# Altium PCB Sample_1.PcbDoc
Units mm, origin at the board's own origin, x right, y up, seen from the top; angles counter-clockwise.
Board outline 43 x 19 mm, 4 copper layers (Top Layer, Layer 1, Layer 2, Bottom Layer), stack 0.871 mm thick; 77 components, 60 nets, 325 pads, 188 vias.
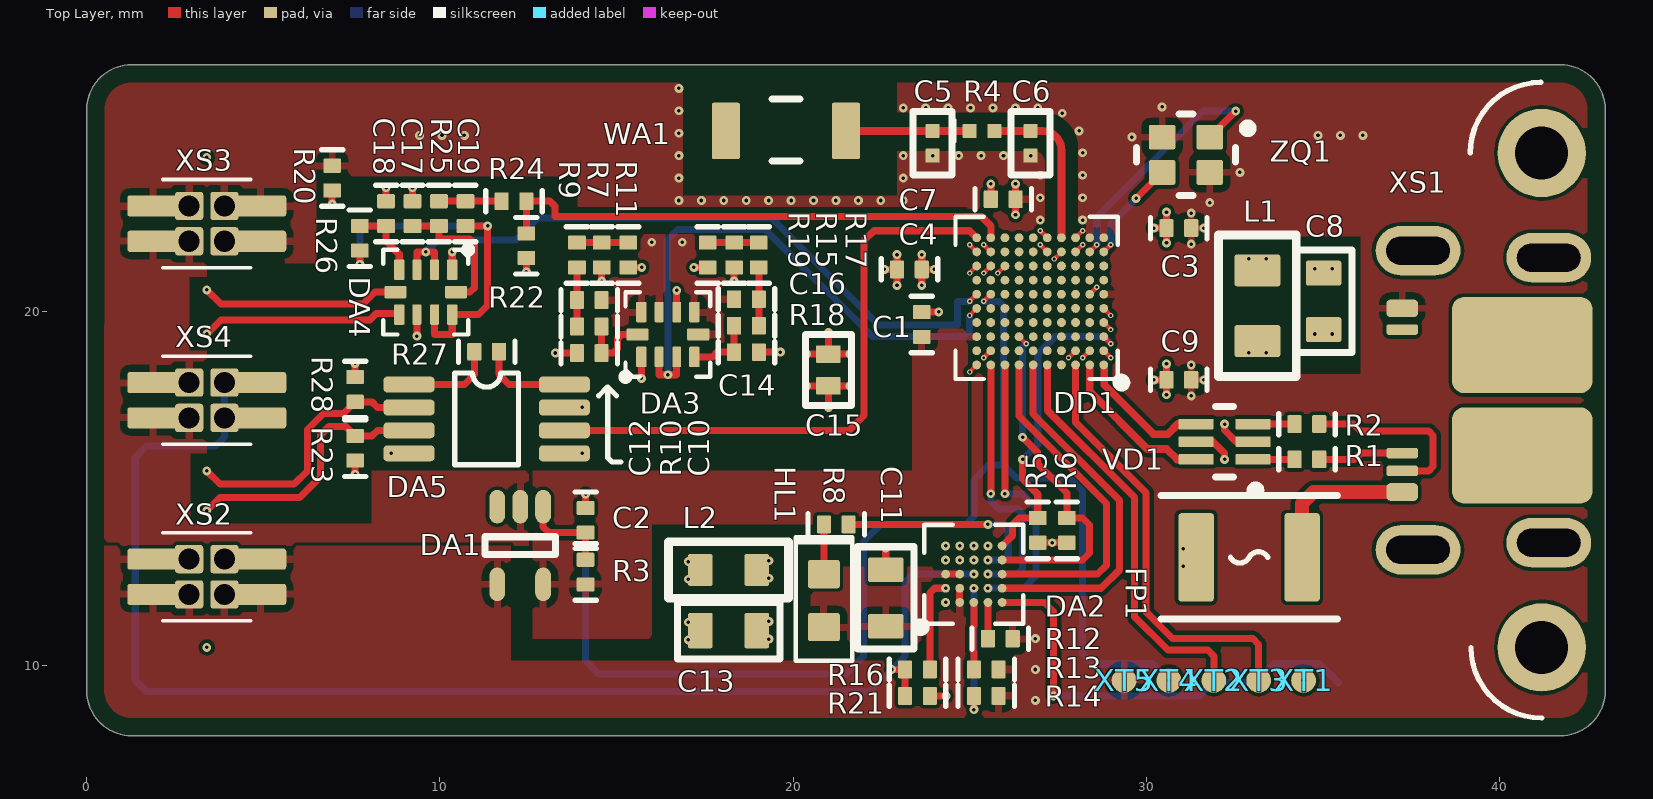
[diagram p0: Top Layer view]
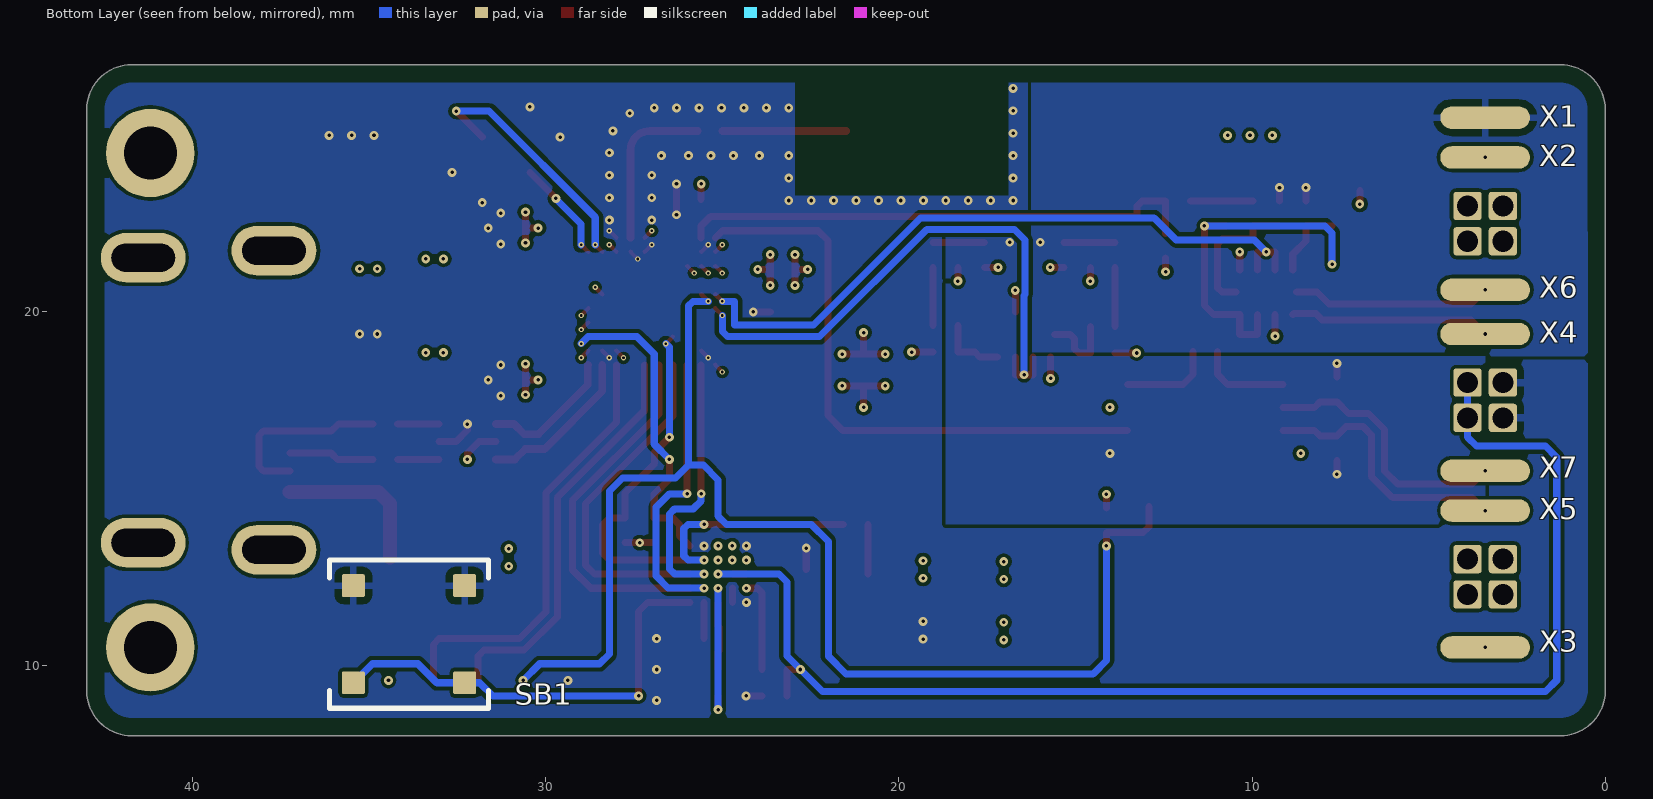
[diagram p1: Bottom Layer view, seen from below]
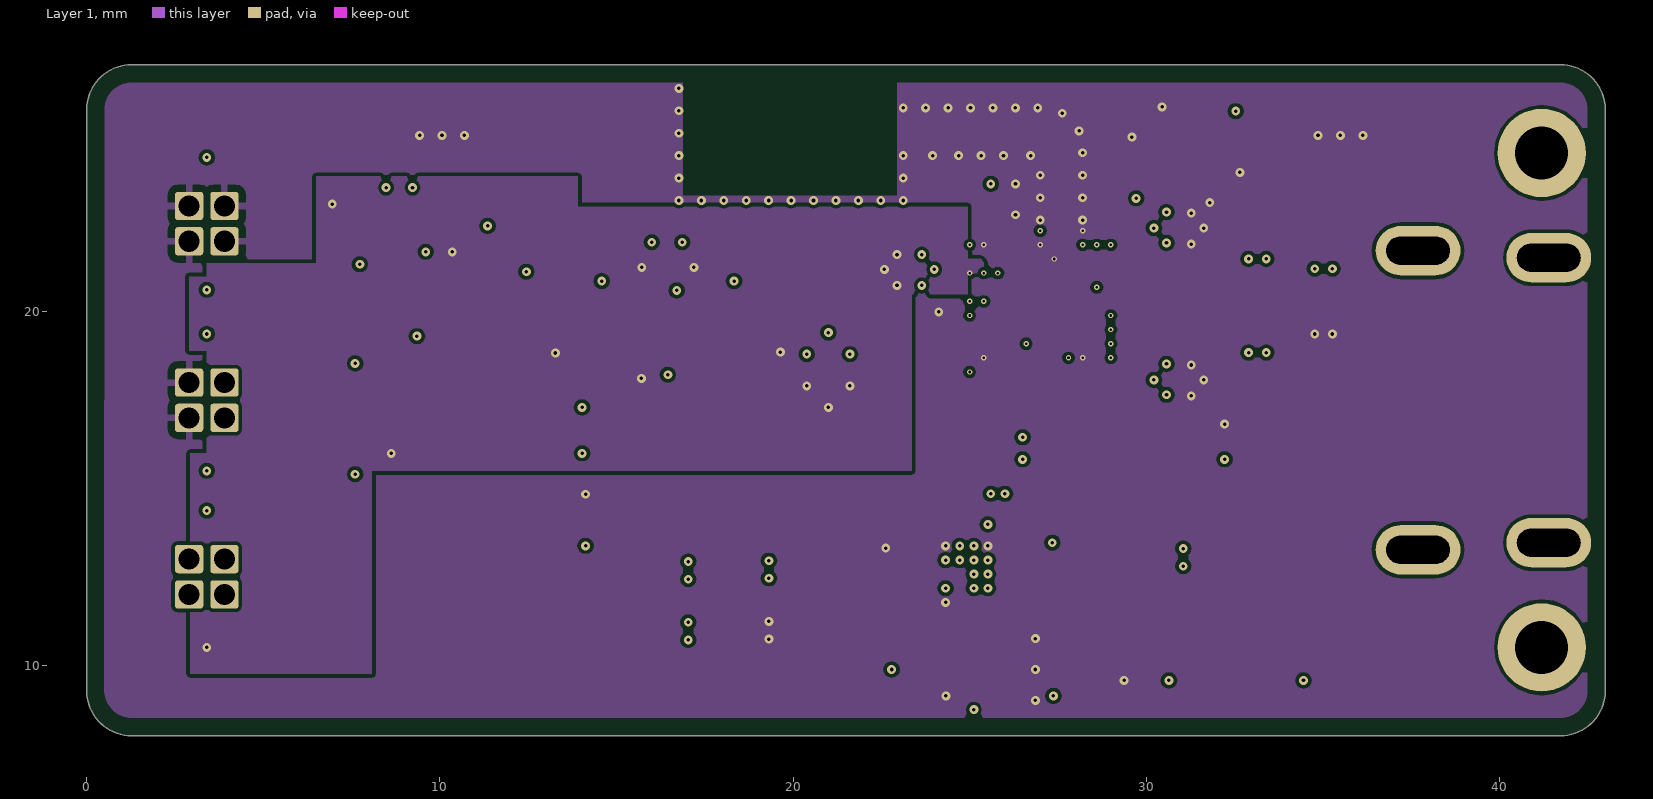
[diagram p2: Layer 1]
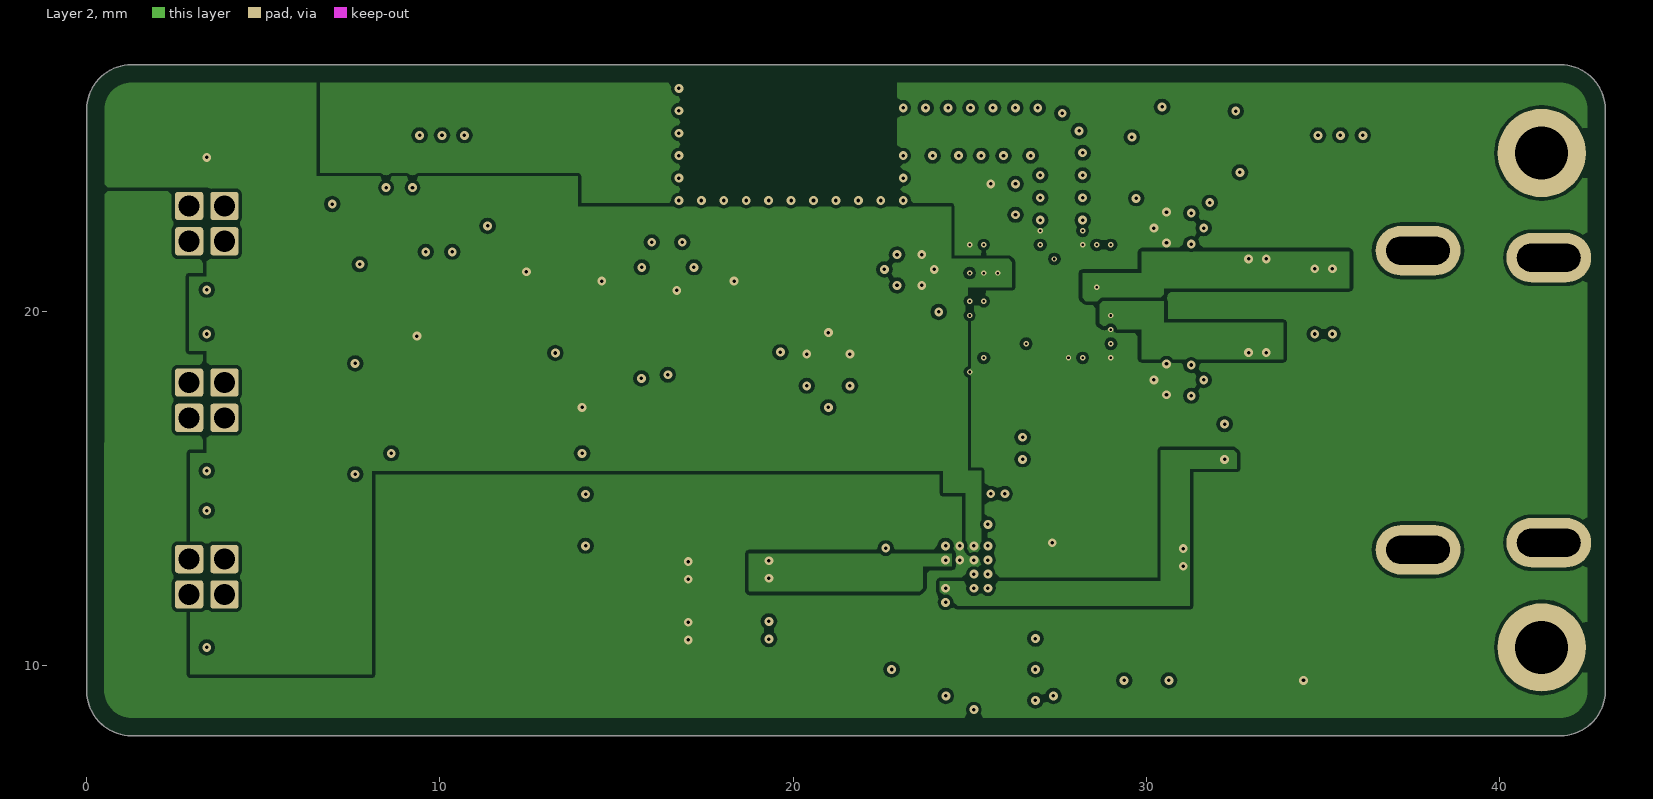
[diagram p3: Layer 2]
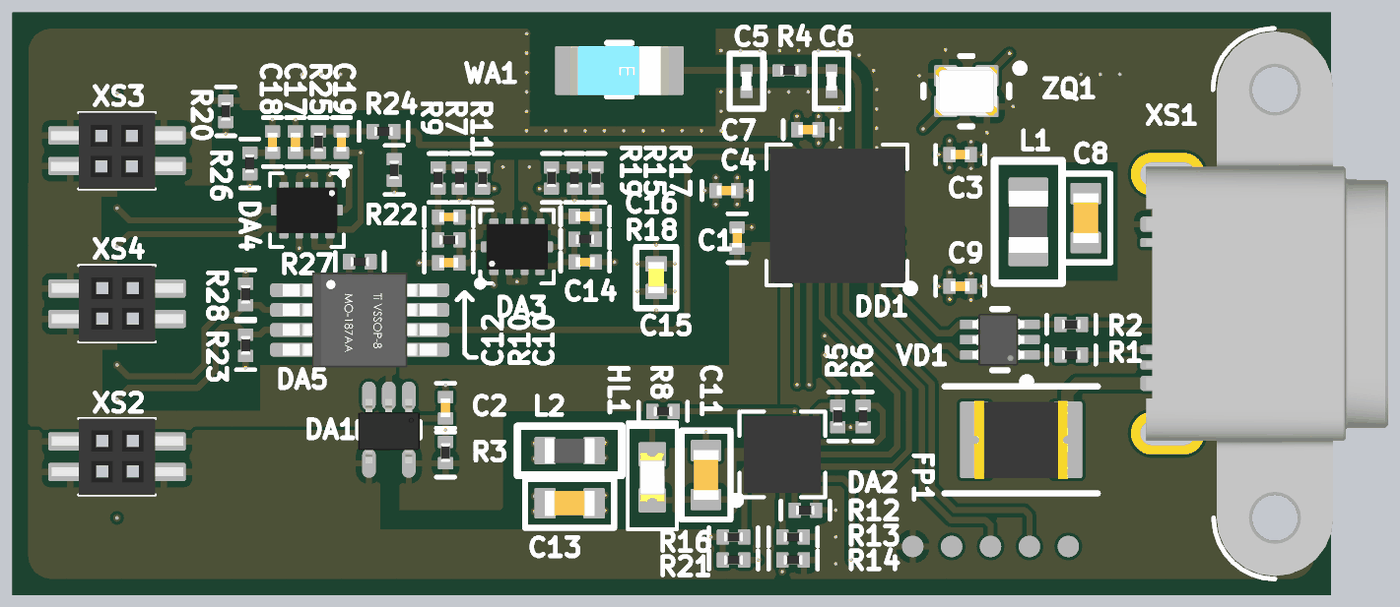
[diagram p4: 3D render of the assembled board from above, using the file's embedded part models]

## Layer stack, top to bottom
Top Solder: solder mask 0.0102, Solder Resist, Dk 3.5
Top Layer: signal copper 0.0356
Dielectric 2: prepreg 0.127, PP-006, Dk 4.1
Layer 1: signal copper 0.018
Dielectric 1: dielectric 0.51, FR-4, Dk 4.8
Layer 2: signal copper 0.018
Dielectric 3: prepreg 0.127, PP-006, Dk 4.1
Bottom Layer: signal copper 0.0356
Bottom Solder: solder mask 0.0102, Solder Resist, Dk 3.5

## Board outline
0,9.25 0,25.73 cw(c1.27,25.73) 1.27,27 41.73,27 cw(c41.73,25.73) 43,25.73 43,9.27 cw(c41.73,9.27) 41.73,8 1.27,8 cw(c1.27,9.27)

## Design rules (kind name [scope] priority, off if disabled: settings)
BoardOutlineClearance [All] p1: gap=0.5 ignorepadtopadclearanceinfootprint=FALSE except(0: Arc-SplitContinuation Track-SplitContinuation SMDPad-SplitContinuation THPad-SplitContinuation Via-SplitContinuation Fill-SplitContinuation Poly-SplitContinuation Region-SplitContinuation Text-SplitContinuation)
Clearance [All] p1: gap=0.1 ignorepadtopadclearanceinfootprint=FALSE except(0: Arc-Hole Track-Hole SMDPad-Hole THPad-Hole Via-Hole Fill-Hole Poly-Hole Region-Hole Text-Hole; 0.05: Arc-Arc Arc-Track Arc-SMDPad Arc-THPad Arc-Via Arc-Text Track-Track Track-SMDPad Track-THPad Track-Via Track-Text SMDPad-Via Via-Via Via-Text; 0.125: Arc-Fill Arc-Poly Arc-Region Track-Fill Track-Poly Track-Region)
ComponentClearance [All] p1: gap=0 collisioncheckmode=3 verticalgap=0 showdistances=FALSE
DiffPairsRouting [All] p1: maxlimit=0.2 minlimit=0.127 mostfreqgap=0.127 toplayer_prefgap=0.2 toplayer_minwidth=0.21 toplayer_maxwidth=0.22 toplayer_prefwidth=0.22 midlayer1_minwidth=0.11 midlayer1_maxwidth=0.11 midlayer1_prefwidth=0.11 midlayer2_minwidth=0.11 midlayer2_maxwidth=0.11 midlayer2_prefwidth=0.11 bottomlayer_minwidth=0.175 bottomlayer_maxwidth=0.175 bottomlayer_prefwidth=0.175 impedanceprofiledriven=TRUE impedanceprofileid={9DE28464-9D2F-4E01-B45C-CA07C9307487} maxuncoupledlength=12.7
HoleToHoleClearance [All] p1: gap=0.2 allowstackedmicrovias=TRUE
MinimumSolderMaskSliver [All] p1: minsoldermaskwidth=0.2
PolygonConnect [HasFootprint('C0201_C0G') vs InNet('GND_Digital')] p1: thpad.connectstyle=Relief thpad.reliefconductorwidth=0.2 thpad.reliefentries=4 thpad.polygonreliefangle="90 Angle" thpad.airgapwidth=0.2 smdpad.connectstyle=Direct smdpad.reliefconductorwidth=0.2 smdpad.reliefentries=4 smdpad.polygonreliefangle="90 Angle" smdpad.airgapwidth=0.2 via.connectstyle=Direct via.reliefconductorwidth=0.254 via.reliefentries=4 via.polygonreliefangle="90 Angle" via.airgapwidth=0.254
PolygonConnect PolygonConnect_1 [HasFootprint('1001312') vs InNet('GND_Digital')] p2: thpad.connectstyle=Relief thpad.reliefconductorwidth=0.2 thpad.reliefentries=4 thpad.polygonreliefangle="90 Angle" thpad.airgapwidth=0.2 smdpad.connectstyle=Direct smdpad.reliefconductorwidth=0.2 smdpad.reliefentries=4 smdpad.polygonreliefangle="90 Angle" smdpad.airgapwidth=0.2 via.connectstyle=Direct via.reliefconductorwidth=0.254 via.reliefentries=4 via.polygonreliefangle="90 Angle" via.airgapwidth=0.254
PolygonConnect PolygonConnect_2 [All] p3: thpad.connectstyle=Relief thpad.reliefconductorwidth=0.2 thpad.reliefentries=4 thpad.polygonreliefangle="90 Angle" thpad.airgapwidth=0.2 smdpad.connectstyle=Relief smdpad.reliefconductorwidth=0.2 smdpad.reliefentries=4 smdpad.polygonreliefangle="90 Angle" smdpad.airgapwidth=0.2 via.connectstyle=Direct via.reliefconductorwidth=0.254 via.reliefentries=4 via.polygonreliefangle="90 Angle" via.airgapwidth=0.254
RoomDefinition Sheet_1 [InComponentClass('Sheet_1')] p1: confinementstyle=ConfineIn formatcopy=TRUE lockcomponents=FALSE outline 0,8 48,8 48,27 0,27
RoomDefinition Sheet_2 [InComponentClass('Sheet_2')] p2: confinementstyle=ConfineIn formatcopy=TRUE lockcomponents=FALSE outline 0,8 43,8 43,27 0,27
RoutingCorners [All] p1: cornerstyle=Round minsetback=2.54 maxsetback=2.54
RoutingTopology [All] p1: topology=Starburst
RoutingVias [All] p1: holewidth=0.3 width=0.6 viastyle="Through Hole" minholewidth=0.05 minwidth=0.1 maxholewidth=5 maxwidth=7
SilkToSilkClearance [All] p1: silktosilkclearance=0
SilkToSolderMaskClearance [IsPad] p1: minsilkscreentomaskgap=0.15 clearancetoexposedcopper=TRUE
SolderMaskExpansion [All] p1: expansion=0
Width Width_1 [InNet('RF_line_50_Ohm')] p1: maxlimit=0.22 minlimit=0.149 preferedwidth=0.22 toplayer_minwidth=0.22 midlayer1_maxwidth=0.149 midlayer1_prefwidth=0.149 midlayer2_maxwidth=0.149 midlayer2_prefwidth=0.149 bottomlayer_minwidth=0.22 impedanceprofiledriven=TRUE impedanceprofileid={D6AA9B95-A936-4709-BEFC-77D6C615F3A8} minimp=50.000000 maximp=50.000000 favimp=50.000000
Width [All] p2: maxlimit=6 minlimit=0.125 preferedwidth=0.254 toplayer_prefwidth=0.2 midlayer1_minwidth=0.254 midlayer1_maxwidth=0.254 midlayer2_minwidth=0.254 midlayer2_maxwidth=0.254 bottomlayer_prefwidth=0.2 minimp=50.000000 maximp=50.000000 favimp=50.000000
22 further rules are at their usual default settings.

## Classes and differential pairs
component class Sheet_2: C10 C11 C12 C13 C14 C15 C16 C17 C18 C19 DA2 DA3 DA4 DA5 HL1 L2 R5 R6 R7 R8 R9 R10 R11 R12 R13 R14 R15 R16 R17 R18 R19 R20 R21 R22 R23 R24 R25 R26 R27 R28 SB1 X1 X2 X3 X4 X5 X6 X7 XS2 XS3 XS4
component class Sheet_1: C1 C2 C3 C4 C5 C6 C7 C8 C9 DA1 DD1 FP1 L1 R1 R2 R3 R4 VD1 WA1 XS1 XT1 XT2 XT3 XT4 XT5 ZQ1
differential pair USB_D: +USB_D_P -USB_D_N

## Components (designator, comment, footprint, x,y, rotation, side; value= is the part's Value field where it differs from the comment)
C1 "X7R" C0201_2 23.645,19.643 r90 top value=0.1u
C2 "X7R" C0201_2 14.125,14.1 r90 top value=0.1u
C3 "X7R" C0201_2 30.925,22.375 r0 top value=0.1u
C4 "X7R" C0201_2 23.295,21.202 r180 top value=0.1u
C5 "C0G" C0201_C0G 23.95,24.775 r270 top value=NC
C6 "C0G" C0201_C0G 26.725,24.775 r270 top value=NC
C7 "X7R" C0201_2 25.95,23.19 r0 top value=0.1u
C8 "X7R" C0603 35.025,20.3 r270 top value=4u7
C9 "X7R" C0201_2 30.925,18.075 r0 top value=0.1u
C10 "X7R" C0201_2 14.231,18.837 r0 top value=0.1u
C11 "X7R" C0603 22.625,11.901 r90 top value=4u7
C12 "X7R" C0201_2 14.231,20.337 r0 top value=0.1u
C13 "X7R" C0603 18.175,10.975 r0 top value=4u7
C14 "X7R" C0201_2 18.681,18.862 r180 top value=0.1u
C15 "X5R" C0402 21,18.355 r270 top value=1u
C16 "X7R" C0201_2 18.681,20.362 r180 top value=0.1u
C17 "X7R" C0201_2 9.225,22.785 r270 top value=0.01u
C18 "X7R" C0201_2 8.475,22.785 r270 top value=0.01u
C19 "X7R" C0201_2 10.725,22.785 r270 top value=0.01u
DA1 "TPS79730QDCKRQ1" SC70-5 12.275,13.384 r180 top value=3.0V
DA2 "BQ25121A" dsbga-25 25.12,12.575 r90 top
DA3 "TLV9042SIRUGR" X2QFN 16.456,19.362 r90 top value=TLV9042S
DA4 "TLV9042SIRUGR" X2QFN 9.6,20.56 r270 top value=TLV9042S
DA5 "INA317IDGKT" VSSOP-8 11.325,16.97 r0 top
DD1 "STM32WB55VC" WLCSP-100 27,20.3 r180 top
FP1 "MF-USM005" F1210 32.915,13.05 r180 top value=MF-USMF010
HL1 "FYLS-0603UGC" LD0603 20.875,11.825 r90 top
L1 "LQM21FN100M70L" L0805 33.15,20.175 r90 top value=10u
L2 "GLFR1608T2R2M-LR" L0603 18.175,12.694 r180 top value=2u2
R1 "ERJ1GN" R0201_2#1 34.55,16.825 r180 top value=22
R2 "ERJ1GN" R0201_2#1 34.55,15.825 r180 top value=22
R3 "ERJ1GN" R0201_2#1 14.125,12.634 r270 top value=51k
R4 "ERJ1GN" R0201_2#2 25.35,25.125 r0 top value=0
R5 "ERJ1GN" R0201_2#1 26.93,13.815 r270 top value=4k7
R6 "ERJ1GN" R0201_2#1 27.755,13.815 r270 top value=4k7
R7 "ERJ1GN" R0201_2#1 14.581,21.611 r270 top value=510k
R8 "ERJ1GN" R0201_2#1 21.225,13.983 r180 top value=510
R9 "ERJ1GN" R0201_2#1 13.881,21.611 r270 top value=510k
R10 "ERJ1GN" R0201_2#1 14.231,19.587 r0 top value=510k
R11 "ERJ1GN" R0201_2#1 15.331,21.611 r90 top value=510k
R12 "ERJ1GN" R0201_2#1 25.87,10.75 r180 top value=15k
R13 "ERJ1GN" R0201_2#1 25.47,9.875 r180 top value=3k9
R14 "ERJ1GN" R0201_2#1 25.47,9.125 r180 top value=2k2
R15 "ERJ1GN" R0201_2#1 18.331,21.611 r270 top value=510k
R16 "ERJ1GN" R0201_2#1 23.525,9.875 r0 top value=51k
R17 "ERJ1GN" R0201_2#1 19.031,21.611 r270 top value=510k
R18 "ERJ1GN" R0201_2#1 18.681,19.612 r180 top value=510k
R19 "ERJ1GN" R0201_2#1 17.581,21.611 r90 top value=510k
R20 "ERJ1GN" R0201_2#1 6.95,23.79 r270 top value=0
R21 "ERJ1GN" R0201_2#1 23.525,9.125 r180 top value=42k2
R22 "ERJ1GN" R0201_2#1 12.45,21.875 r270 top value=51k
R23 "ERJ1GN" R0201_2#1 7.6,16.142 r270 top value=51k
R24 "ERJ1GN" R0201_2#1 12.1,23.135 r180 top value=51k
R25 "ERJ1GN" R0201_2#1 9.975,22.785 r270 top value=51k
R26 "ERJ1GN" R0201_2#1 7.735,22.085 r90 top value=51k
R27 "ERJ1GN" R0201_2#1 11.325,18.875 r180 top value=10k
R28 "ERJ1GN" R0201_2#1 7.6,17.805 r270 top value=51k
SB1 "USLPT3737AL5TR" USLPT3737AL5TR 33.875,10.875 r0 bottom
VD1 "USBLC6-2P6" SOT-666 32.22,16.325 r90 top
WA1 "X7R" AMCA31-2R450G-S1F-T3 19.8,25.125 r180 top value="2.45 GHz"
X1 "Contact" TEST_PIN_2#1 3.4,25.5 r180 bottom
X2 "Contact" TEST_PIN_2#1 3.4,24.375 r180 bottom
X3 "Contact" TEST_PIN_2#1 3.4,10.5 r180 bottom
X4 "Contact" TEST_PIN_2#1 3.4,19.375 r180 bottom
X5 "Contact" TEST_PIN_2#1 3.4,14.375 r180 bottom
X6 "Contact" TEST_PIN_2#1 3.4,20.625 r180 bottom
X7 "Contact" TEST_PIN_2#1 3.4,15.5 r180 bottom
XS1 "2108877-1 TE Connectivity" 2108877-1 43,17.5 r180 top value=2108877-1
XS2 "C5812-04BDGHNTR" C5812-04 3.4,12.5 r180 top
XS3 "C5812-04BDGHNTR" C5812-04 3.4,22.5 r0 top
XS4 "C5812-04BDGHNTR" C5812-04 3.4,17.5 r180 top
XT1 "Test_Pin" TEST_PIN_2#2 34.455,9.565 r90 top
XT2 "Test_Pin" TEST_PIN_2#2 31.915,9.565 r90 top
XT3 "Test_Pin" TEST_PIN_2#2 33.185,9.565 r90 top
XT4 "Test_Pin" TEST_PIN_2#2 30.645,9.565 r90 top
XT5 "Test_Pin" TEST_PIN_2#2 29.375,9.565 r90 top
ZQ1 "XRCGB" XRCGB 31.125,24.45 r180 top value=32MHz

## Footprints (in the part's own frame and the unit in brackets; to place one, negate y for a bottom-side part, rotate by r counter-clockwise, add the part's x,y. Pads: shape width x height; smd on the part's side, far side on the other; paste and mask are expansions set on the pad)
2108877-1 [mm]
  rrect50% 0.9x0.5 smd: 1(5.75,2.6) 5(5.75,-2.6)
  rrect50% 0.9x0.3 smd: 2(5.75,2) 3(5.75,1.5) 4(5.75,-2)
  rrect25% 3.98x2.725 smd: 6(2.35,1.562) 7(2.35,-1.562)
  rrect100% 2.4x1.4 hole 0.8 slot 1.8 at 0 deg: NC(1.6,4.035) NC(1.6,-4.035) NC(5.3,4.235) NC(5.3,-4.235)
  round 2.5 hole 1.5: NC(1.8,7) NC(1.8,-7)
  silkscreen extent 1.8,-9 3.83,9, body extent -1.9,-8.9 6,8.9, height 3.41
AMCA31-2R450G-S1F-T3 [mm]
  rrect15% 0.8x1.6 smd: 1(-1.7,0) 2(1.7,0)
  silkscreen extent -0.4,-0.9 0.4,0.85, body extent -1.6,-0.8 1.6,0.8, height 1.2
C0201_2 [mm] "0603M"
  rrect15% 0.4x0.5 smd: 1(-0.35,0) 2(0.35,0)
  silkscreen extent -0.8,-0.3 0.8,0.3, body extent -0.31,-0.16 0.31,0.16, height 0.34
C0201_C0G [mm] "0603M"
  rrect15% 0.4x0.4 smd: 1(-0.35,0) 2(0.35,0)
  silkscreen extent -0.9,-0.55 0.9,0.55, body extent -0.31,-0.16 0.31,0.16, height 0.34
C0402 [mm] "1005M"
  rrect15% 0.5x0.7 smd: 1(-0.45,0) 2(0.45,0)
  silkscreen extent -1,-0.65 1,0.65, body extent -0.51,-0.26 0.51,0.26, height 0.51
C0603 [mm] "1608M"
  rrect15% 0.7x1 smd: 1(-0.8,0) 2(0.8,0)
  silkscreen extent -1.45,-0.8 1.45,0.8, body extent -0.81,-0.41 0.81,0.41, height 0.82
C5812-04 [mm]
  rrect25% 1.45x0.6 smd: 1(-1.525,0.5) 2(-1.525,-0.5) 3(1.525,-0.5) 4(1.525,0.5)
  rrect20% 0.8x0.8 hole 0.6: 1(-0.5,0.5) 2(-0.5,-0.5) 3(0.5,-0.5) 4(0.5,0.5)
  silkscreen extent -1.25,-1.25 1.25,1.25, body extent -2.16,-1.25 2.14,1.25, height 2.1
dsbga-25 [mm]
  rrect100% 0.25x0.25 smd: A1(-0.8,0.8) A2(-0.4,0.8) A3(0,0.8) A4(0.4,0.8) A5(0.8,0.8) B1(-0.8,0.4) B2(-0.4,0.4) B3(0,0.4) B4(0.4,0.4) B5(0.8,0.4) C1(-0.8,0) C2(-0.4,0) C3(0,0) C4(0.4,0) C5(0.8,0) D1(-0.8,-0.4) D2(-0.4,-0.4) D3(0,-0.4) D4(0.4,-0.4) D5(0.8,-0.4) E1(-0.8,-0.8) E2(-0.4,-0.8) E3(0,-0.8) E4(0.4,-0.8) E5(0.8,-0.8)
  silkscreen extent -1.62,-1.4 1.4,1.62, body extent -1.25,-1.25 1.25,1.25, height 0.55
F1210 [mm]
  rrect15% 1x2.5 smd: 1(-1.5,0) 2(1.5,0)
  silkscreen extent -2.5,-1.75 2.5,1.75, body extent -1.52,-1.27 1.52,1.27, height 0.83
L0603 [mm] "1608M"
  rrect15% 0.7x0.9 smd: 1(-0.8,0) 2(0.8,0)
  Top Layer pour cut-out: -0.45,0.5 0.45,0.5 0.45,-0.5 -0.45,-0.5
  silkscreen extent -1.7,-0.8 1.7,0.8, body extent -0.81,-0.41 0.81,0.41, height 0.81
L0805 [mm]
  rrect15% 0.9x1.3 smd: 1(-1,0) 2(1,0)
  Top Layer pour cut-out: -0.65,0.8 0.65,0.8 0.65,-0.8 -0.65,-0.8
  silkscreen extent -2,-1.1 2,1.1, body extent -1.01,-0.64 1.01,0.63, height 0.96
LD0603 [mm]
  rrect15% 0.8x0.9 smd: 1(-0.75,0) 2(0.75,0)
  silkscreen extent -1.7,-0.8 1.8,0.8, body extent -0.8,-0.4 0.8,0.4, height 0.7
R0201_2#1 [mm] "1005M"
  rrect15% 0.4x0.5 smd: 1(-0.35,0) 2(0.35,0)
  silkscreen extent -0.8,-0.3 0.8,0.3, body extent -0.3,-0.15 0.3,0.15, height 0.23
R0201_2#2 [mm] "1005M"
  rrect15% 0.4x0.4 smd: 1(-0.35,0) 2(0.35,0)
  silkscreen extent -0.8,-0.3 0.8,0.3, body extent -0.3,-0.15 0.3,0.15, height 0.23
SC70-5 [mm]
  rrect100% 0.45x0.95 smd: 1(-0.65,-1.1) 2(0,-1.1) 3(0.65,-1.1) 4(0.65,1.1) 5(-0.65,1.1)
  silkscreen extent -1,-0.25 1,0.25, body extent -1,-1 1,1.1, height 0.95
SOT-666 [mm]
  rrect15% 0.3x0.99 smd: 1(-0.5,-0.805) 2(0,-0.805) 3(0.5,-0.805) 4(0.5,0.805) 5(0,0.805) 6(-0.5,0.805)
  silkscreen extent -1.5,-1 1,0.25, body extent -0.85,-0.8 0.85,0.9, height 0.6
TEST_PIN_2#1 [mm]
  rrect100% 2.54x0.635 smd: 1(0,0)
TEST_PIN_2#2 [mm]
  rrect100% 0.7x0.7 smd: 1(0,0)
USLPT3737AL5TR [mm]
  rrect15% 0.65x0.65 smd: 1(-1.575,1.375) 2(-1.575,-1.375) 3(1.575,1.375) 4(1.575,-1.375)
  silkscreen extent -2.25,-2.1 2.25,2.1, body extent -1.85,-1.85 1.85,1.85, height 0.35
VSSOP-8 [mm]
  rrect50% 1.45x0.45 smd: 1(-2.2,0.975) 2(-2.2,0.325) 3(-2.2,-0.325) 4(-2.2,-0.975) 5(2.2,-0.975) 6(2.2,-0.325) 7(2.2,0.325) 8(2.2,0.975)
  silkscreen extent -0.9,-1.3 0.9,1.3, body extent -2.52,-1.55 2.52,1.55, height 1.15
WLCSP-100 [mm]
  rrect100% 0.25x0.25 smd: A1(-1.8,1.8) A2(-1.4,1.8) A3(-1,1.8) A4(-0.6,1.8) A5(-0.2,1.8) A6(0.2,1.8) A7(0.6,1.8) A8(1,1.8) A9(1.4,1.8) A10(1.8,1.8) B1(-1.8,1.4) B2(-1.4,1.4) B3(-1,1.4) B4(-0.6,1.4) B5(-0.2,1.4) B6(0.2,1.4) B7(0.6,1.4) B8(1,1.4) B9(1.4,1.4) B10(1.8,1.4) C1(-1.8,1) C2(-1.4,1) C3(-1,1) C4(-0.6,1) C5(-0.2,1) C6(0.2,1) C7(0.6,1) C8(1,1) C9(1.4,1) C10(1.8,1) D1(-1.8,0.6) D2(-1.4,0.6) D3(-1,0.6) D4(-0.6,0.6) D5(-0.2,0.6) D6(0.2,0.6) D7(0.6,0.6) D8(1,0.6) D9(1.4,0.6) D10(1.8,0.6) E1(-1.8,0.2) E2(-1.4,0.2) E3(-1,0.2) E4(-0.6,0.2) E5(-0.2,0.2) E6(0.2,0.2) E7(0.6,0.2) E8(1,0.2) E9(1.4,0.2) E10(1.8,0.2) F1(-1.8,-0.2) F2(-1.4,-0.2) F3(-1,-0.2) F4(-0.6,-0.2) F5(-0.2,-0.2) F6(0.2,-0.2) F7(0.6,-0.2) F8(1,-0.2) F9(1.4,-0.2) F10(1.8,-0.2) G1(-1.8,-0.6) G2(-1.4,-0.6) G3(-1,-0.6) G4(-0.6,-0.6) G5(-0.2,-0.6) G6(0.2,-0.6) G7(0.6,-0.6) G8(1,-0.6) G9(1.4,-0.6) G10(1.8,-0.6) H1(-1.8,-1) H2(-1.4,-1) H3(-1,-1) H4(-0.6,-1) H5(-0.2,-1) H6(0.2,-1) H7(0.6,-1) H8(1,-1) H9(1.4,-1) H10(1.8,-1) J1(-1.8,-1.4) J2(-1.4,-1.4) J3(-1,-1.4) J4(-0.6,-1.4) J5(-0.2,-1.4) J6(0.2,-1.4) J7(0.6,-1.4) J8(1,-1.4) J9(1.4,-1.4) J10(1.8,-1.4) K1(-1.8,-1.8) K2(-1.4,-1.8) K3(-1,-1.8) K4(-0.6,-1.8) K5(-0.2,-1.8) K6(0.2,-1.8) K7(0.6,-1.8) K8(1,-1.8) K9(1.4,-1.8) K10(1.8,-1.8)
  silkscreen extent -2.42,-2.4 2.4,2.42, body extent -2.12,-2.28 2.28,2.12, height 0.63
X2QFN [mm]
  rrect25% 0.58x0.3 smd: 1(-0.635,0.75) 4(-0.635,-0.75) 6(0.635,-0.75) 9(0.635,0.75)
  rrect25% 0.58x0.25 smd: 2(-0.635,0.25) 3(-0.635,-0.25) 7(0.635,-0.25) 8(0.635,0.25)
  rrect25% 0.35x0.63 smd: 5(0,-0.86) 10(0,0.86)
  silkscreen extent -1.27,-1.2 1.2,1.27, body extent -0.75,-1 0.75,1, height 0.35
XRCGB [mm]
  rrect15% 0.75x0.7 smd: 1(-0.675,-0.5) 2(0.675,-0.5) 3(0.675,0.5) 4(-0.675,0.5)
  silkscreen extent -1.85,-1.15 1.4,1.15, body extent -1,-0.8 1,0.8, height 0.65

## Part data
C1 C2 C3 C4 C7 C9 C10 C12 C14 C16 C18: library part "X7R C0201", Voltage=16V, Published=18.05.2010, Publisher="Andrew Danich", Type=Конденсатор
C5 C6: library part "C0G C0201", Published=18.05.2010, Publisher="Andrew Danich", Type=Конденсатор
C8: library part "X7R C0603", Voltage=6.3V, Published=18.05.2010, Publisher="Andrew Danich", Type=Конденсатор
C11 C13: library part "X7R C0603", Voltage=10V, Published=18.05.2010, Publisher="Andrew Danich", Type=Конденсатор
C15: library part "X5R C0402", Voltage=6.3V, Published=18.05.2010, Publisher="Andrew Danich", Type=Конденсатор
C17 C19: library part "X7R C0201", Voltage=50V, Published=18.05.2010, Publisher="Andrew Danich", Type=Конденсатор
R1 R2 R3 R4 R5 R6 R7 R8 R9 R10 R11 R12 R13 R14 R15 R16 R17 R18 R19 R20 R21 R22 R23 R24 R25 R26 R27 R28: library part R0201, Published=19.09.2014, Publisher="Andrew Danich", Type=Резистор
WA1: library part AMCA31-2R450G-S1F-T3, Published=18.05.2010, Publisher="Andrew Danich", Type=Конденсатор, Z="50 Ohm"
XS1: library part 2108877-1, 1_line="V Bus", 2_line=D-, 3_line=D+, 4_line=ID, 5_line=GND, 6_line=CORP, 7_line=CORP, Published=07.03.2013, Publisher="Andrew Danich", Type=Розетка
DA1: Name=TPS79730QDCKRQ1, Published=21.01.2015, Publisher="Andrew Danich", Type=Микросхема
DA2: Published=29.07.2015, Publisher="Andrew Danich", Type=Модуль
DA3 DA4: Published=08.12.2013, Publisher="Andrew Danich", Type=Микросхема
DA5: Published=19.12.2015, Publisher="Andrew Danich", Type=Микросхема
DD1: Published=16.10.2015, Publisher="Andrew Danich", Type=Микросхема
FP1: Published=24.09.2010, Publisher="Andrew Danich", Type="Вставка плавкая"
HL1: Published=03.12.2013, Publisher="Andrew Danich", Type="Индикатор единичный"
L1: Name=LQM21FN100M70L, Published=20.05.2010, Publisher="Andrew Danich", Type=Дроссель
L2: Name=GLFR1608T2R2M-LR, Published=20.05.2010, Publisher="Andrew Danich", Type=Дроссель
SB1: Published=17.04.2014, Publisher="Andrew Danich", Type=Переключатель
VD1: Published=08.07.2014, Publisher="Andrew Danich", Type="Сборка диодная"
X1 X2 X3 X4 X5 X6 X7 XT1 XT2 XT3 XT4 XT5: Published=07.03.2013, Publisher="Andrew Danich", Type=Розетка
XS2: 1_line=V_Battery, 2_line=V_Battery, 3_line=V_Battery, 4_line=V_Battery, Published=07.03.2013, Publisher="Andrew Danich", Type=Розетка
XS3: 1_line=GND_Digital, 2_line=GND_Digital, 3_line=GND_Digital, 4_line=GND_Digital, Published=07.03.2013, Publisher="Andrew Danich", Type=Розетка
XS4: 1_line=TS_Battery, 2_line=TS_Battery, 3_line=GND_Digital, 4_line=GND_Digital, Published=07.03.2013, Publisher="Andrew Danich", Type=Розетка
ZQ1: Model=XRCGB, Published=27.08.2015, Publisher="Andrew Danich", Type=Резонатор

## Via types
v1: diameter 0.25, hole 0.1, Top Layer to Bottom Layer, tented both sides, 163 vias
v2: diameter 0.15, hole 0.075, Top Layer to Bottom Layer, tented both sides, 25 vias

## Nets (pads, with @x,y where several pads share a name; then routed paths per layer and width w, separated by ;. In a path a pad name is that pad's centre, name@x,y a point inside that pad or via, vN(x,y) a via of type N, cw(c..) or ccw(c..) an arc to the next point about the centre after c; other vN are vias at no path point)
ADC_Signal: DA5.6 DD1.K10 | length 17
  Top Layer w0.2: DA5.6 21.594,16.645 22.012,17.064 22.012,22.021 22.29,22.298 25.002,22.298 DD1.K10
Battery_TS: DA2.C3 R16.1 R21.2 XS4.1 XS4.2 | length 38.2
  Top Layer w0.2: v1(22.789,9.875) R16.1 R21.2
  Bottom Layer w0.2: XS4.2@3.9,18 3.9,17 3.9,16.452 3.648,16.2 1.695,16.2 1.375,15.88 1.375,9.57 1.695,9.25 22.164,9.25 v1(22.789,9.875) 23.175,10.261 23.175,12.35 23.4,12.575 v1(25.12,12.575)
DAC_PWM_Signal: DD1.K9 R22.1 R24.1 | length 14.9
  Top Layer w0.2: R22.1 R24.1 13.12,23.135 13.255,23 13.255,22.697 25.342,22.697 25.6,22.439 DD1.K9
GEN_EN: DA4.2 DA4.3 DD1.F10 | length 19.5
  Top Layer w0.125: v2(25,20.3) DD1.F10
  Top Layer w0.2: DA4.3 9.35,21.7 v1(9.6,21.7) 9.85,21.7 DA4.2
  Bottom Layer w0.2: v1(9.6,21.7) 9.938,22.038 12.148,22.038 12.773,22.664 19.385,22.664 22.424,19.625 24.651,19.625 24.651,20.3 v2(25,20.3)
GND_Analog: C4.2 C10.1 C14.1 C15.2 DA3.1 DA4.1 DA5.4 DD1.H10 R11.1 R19.1 R20.2 X3.1 | length 6.8
  Top Layer w0.125: v2(25,21.1) DD1.H10
  Top Layer w0.2: v1(6.95,23.054) R20.2 ; DA4.1 v1(10.35,21.7) ; v1(13.27,18.837) C10.1 ; R11.1 v1(15.718,21.261) ; v1(15.706,18.116) DA3.1 ; v1(17.195,21.261) R19.1 ; C14.1 v1(19.642,18.862) ; v1(20.389,17.905) C15.2 ; v1(21,17.294) C15.2 ; v1(21.611,17.905) C15.2 ; v1(22.589,21.202) C4.2 ; v1(22.945,20.75) C4.2 ; v1(22.945,21.625) C4.2
  other v1: 3.4,10.5 8.625,15.995
GND_Digital: C1.2 C2.2 C3.2 C5.2 C6.2 C7.2 C8.2 C9.2 C11.2 C13.2 DA1.2 DA2.A1 DA2.A5 DA2.D5 DD1.B2 DD1.B9 DD1.F1 DD1.J4 DD1.J5 DD1.J9 DD1.K1 DD1.K2 DD1.K3 R12.1 R13.1 R14.1 R20.1 R21.1 SB1.2 SB1.4 VD1.2 XS1.5 XS3.1 XS3.2 XS3.3 XS3.4 XS4.3 XS4.4 XT5.1 ZQ1.2 ZQ1.4 | length 5.6
  Top Layer w0.125: v2(25.4,18.7) DD1.B9 ; v2(25.4,21.9) DD1.J9 ; v2(27,21.9) DD1.J5 ; v2(27.4,21.5) DD1.J4 ; DD1.K3 v2(28.2,22.3) ; v2(28.2,18.7) DD1.B2
  Top Layer w0.2: C2.2 v1(14.125,14.836) ; C11.2 v1(22.625,13.312) ; C1.2 23.651,20 v1(24.125,20) ; R21.1 v1(24.327,9.125) ; v1(26.3,22.75) C7.2 v1(26.3,23.625) ; v1(32.22,16.825) 32.22,16.652 32.547,16.325 VD1.2
  other v1: 26.865,8.998 29.375,9.565 26.865,9.875 19.317,10.738 26.865,10.752 19.317,11.238 24.32,11.775 24.32,13.375 25.52,13.375 31.275,17.623 31.63,18.075 31.275,18.498 34.775,19.375 35.275,19.375 31.275,21.923 31.63,22.375 27,22.6 28.2,22.6 31.275,22.798 31.8,23.095 16.77,23.155 17.405,23.155 18.04,23.155 18.675,23.155 19.31,23.155 19.945,23.155 20.58,23.155 21.215,23.155 21.85,23.155 22.485,23.155 23.12,23.155 27,23.235 28.2,23.235 16.77,23.79 23.12,23.79 27,23.87 28.2,23.87 32.655,23.95 16.77,24.425 23.12,24.425 23.95,24.425 24.69,24.425 25.325,24.425 25.96,24.425 26.725,24.425 28.2,24.505 29.595,24.95 9.425,25 10.06,25 10.695,25 34.865,25 35.5,25 36.135,25 16.77,25.06 28.1,25.125 27.625,25.625 16.77,25.695 23.12,25.775 23.755,25.775 24.39,25.775 25.025,25.775 25.66,25.775 26.295,25.775 26.93,25.775 30.45,25.805 16.77,26.33
INT_Battery: DA2.D2 DD1.A8 | length 8.1
  Top Layer w0.2: v1(26,14.85) DD1.A8
  Bottom Layer w0.2: v1(25.52,12.175) 25.53,12.185 26.539,12.185 26.875,12.521 26.875,14.473 26.498,14.85 v1(26,14.85)
LSCTRL_Battery: DA2.E3 DD1.A7 | length 9.8
  Top Layer w0.2: DA2.E3 28.625,12.575 28.875,12.825 28.875,14.575 26.4,17.05 DD1.A7
N_CD_Battery: DA2.E2 DD1.A6 | length 10.4
  Top Layer w0.2: DA2.E2 28.725,12.175 29.25,12.7 29.25,14.66 26.8,17.11 DD1.A6
N_RST: C2.1 DA1.1 DD1.F9 R3.1 XT4.1 | length 38.1
  Top Layer w0.125: v2(25.4,20.3) DD1.F9
  Top Layer w0.2: DA1.1 12.925,13.914 13.089,13.75 C2.1 v1(14.125,13.375) R3.1
  Bottom Layer w0.2: v1(14.125,13.375) 14.125,10.125 14.5,9.75 21.5,9.75 22,10.25 22,13.5 22.483,13.983 24.887,13.983 25.12,14.215 25.12,15.245 25.54,15.665 25.96,15.665 ; v2(25.4,20.3) 25.835,20.3 25.96,20.175 25.96,15.665 ; v1(30.645,9.565) 30.173,10.037 28.48,10.037 28.2,10.317 28.2,14.925 27.825,15.3 26.325,15.3 25.96,15.665
N_RST_Battery: DA2.D3 DD1.A9 | length 7.5
  Top Layer w0.2: v1(25.6,14.85) DD1.A9
  Bottom Layer w0.2: v1(25.52,12.575) 26.35,12.575 26.5,12.725 26.5,14.275 26.35,14.425 25.825,14.425 25.6,14.65 v1(25.6,14.85)
NetC5_1: C5.1 R4.1 WA1.1 | length 3.5
  Top Layer w0.22: WA1.1 C5.1 R4.1
NetC8_1: C8.1 DD1.F2 L1.2 | length 0.3
  Top Layer w0.125: DD1.F2 v2(28.6,20.7)
  other v1: 34.775,21.225 35.275,21.225 32.9,21.5 33.4,21.5
NetC10_2: C10.2 DA3.10 R10.2 | length 2.1
  Top Layer w0.2: R10.2 C10.2 14.906,18.837 15.027,18.958 15.027,19.241 15.149,19.362 DA3.10
NetC11_1: C11.1 DA2.A3 DA2.B3 HL1.1 | length 0.4
  Top Layer w0.2: DA2.A3 DA2.B3
NetC12_1: C12.1 R9.2 R10.1 | length 1.7
  Top Layer w0.2: R10.1 C12.1 R9.2
NetC14_2: C14.2 DA3.4 R18.2 | length 1.9
  Top Layer w0.2: DA3.4 17.716,18.727 17.851,18.862 C14.2 R18.2
NetC16_1: C16.1 R17.2 R18.1 | length 1.6
  Top Layer w0.2: R18.1 C16.1 R17.2
NetC17_2: C17.2 DA4.10 R25.2 | length 4
  Top Layer w0.2: C17.2 R25.2 9.975,22.06 10.853,22.06 10.975,21.938 10.975,20.677 10.858,20.56 DA4.10
NetC18_2: C18.2 DA4.4 R26.2 | length 2.1
  Top Layer w0.2: R26.2 C18.2 8.475,22.01 8.85,21.635 DA4.4
NetC19_1: C19.1 R24.2 R25.1 | length 1.8
  Top Layer w0.2: R25.1 C19.1 R24.2
NetC19_2: C19.2 DA4.8 DA4.9 R26.1 | length 10.6
  Top Layer w0.2: v1(7.735,21.349) R26.1 ; DA4.8 9.85,19.362 10.35,19.362 DA4.9 11.09,19.925 11.35,20.185 v1(11.35,22.435) C19.2
  Bottom Layer w0.2: v1(7.735,21.349) 7.735,22.235 7.935,22.435 v1(11.35,22.435)
NetDA2_A4: DA2.A4 L2.1
  other v1: 19.317,12.457 19.317,12.957 24.32,12.975
NetDA2_C1: DA2.C1 R13.2 | length 1.9
  Top Layer w0.2: R13.2 25.125,9.88 25.125,10.375 25.095,10.405 25.095,11.076 25.12,11.101 DA2.C1
NetDA2_C2: DA2.C2 R14.2 | length 3.8
  Top Layer w0.2: v1(25.12,8.739) R14.2
  Bottom Layer w0.2: v1(25.12,8.739) v1(25.12,12.175)
NetDA2_D1: DA2.D1 R12.2 | length 1
  Top Layer w0.2: R12.2 DA2.D1
NetDA2_D4: DA2.D4 R8.1 | length 6
  Top Layer w0.2: R8.1 v1(25.518,13.983)
  Bottom Layer w0.2: v1@25.51,12.985 v1(25.52,12.975) 25.975,12.975 26.095,13.095 26.095,13.863 25.975,13.983 v1(25.518,13.983)
NetDA2_E1: DA2.E1 SB1.1 SB1.3 | length 12.6
  Top Layer w0.2: DA2.E1 27.12,11.775 27.375,11.52 v1(27.375,9.125)
  Bottom Layer w0.2: v1(27.375,9.125) 31.5,9.125 31.875,9.5 SB1.1 33.087,9.5 33.625,10.037 34.913,10.037 SB1.3
NetDA4_5: DA4.5 X6.1 | length 5.6
  Top Layer w0.2: v1(3.4,20.625) 3.8,20.225 7.825,20.225 8.16,20.56 DA4.5
NetDA4_6: DA4.6 X4.1 | length 5.7
  Top Layer w0.2: v1(3.4,19.375) 3.8,19.775 8.015,19.775 8.19,19.949 8.826,19.949 DA4.6
NetDA5_1: DA5.1 R27.2 | length 2.6
  Top Layer w0.2: DA5.1 10.695,17.945 10.975,18.225 R27.2
NetDA5_2: DA5.2 R28.2 X7.1 | length 7.6
  Top Layer w0.2: v1(3.4,15.5) 3.775,15.125 5.875,15.125 6.25,15.5 6.25,16.675 6.7,17.125 7.27,17.125 R28.2 8.072,17.455 8.231,17.295 DA5.2
NetDA5_3: DA5.3 R23.1 X5.1 | length 7.6
  Top Layer w0.2: v1(3.4,14.375) 3.775,14.75 6.03,14.75 6.625,15.345 6.625,16.52 6.855,16.75 7.342,16.75 R23.1 8.078,16.492 8.231,16.645 DA5.3
NetDA5_8: DA5.8 R27.1 | length 2.6
  Top Layer w0.2: R27.1 11.675,18.225 11.955,17.945 DA5.8
NetDD1_E1: DD1.E1 L1.1 | length 0.3
  Top Layer w0.125: DD1.E1 v2(29,19.9)
  other v1: 32.9,18.85 33.4,18.85
NetDD1_J1: DD1.J1 ZQ1.3 | length 2.9
  Top Layer w0.125: DD1.J1 v2(29,21.9)
  Top Layer w0.2: v1(29.715,23.215) ZQ1.3
  Bottom Layer w0.2: v2(29,21.9) 29,22.486 29.715,23.202 v1(29.715,23.215)
NetDD1_J2: DD1.J2 ZQ1.1 | length 7.3
  Top Layer w0.125: DD1.J2 v2(28.6,21.9)
  Top Layer w0.2: ZQ1.1 v1(32.535,25.685)
  Bottom Layer w0.2: v2(28.6,21.9) 28.6,22.679 31.606,25.685 v1(32.535,25.685)
NetFP1_1: FP1.1 XS1.1 | length 4.5
  Top Layer w0.4: FP1.1 34.415,14.575 34.74,14.9 XS1.1
NetHL1_2: HL1.2 R8.2 | length 1.4
  Top Layer w0.2: HL1.2 R8.2
NetR1_1: R1.1 XS1.2 | length 5.2
  Top Layer w0.2: R1.1 35.875,16.825 36.075,16.625 38,16.625 38.125,16.5 38.125,15.625 38,15.5 XS1.2
NetR1_2: R1.2 VD1.3 | length 1.2
  Top Layer w0.2: VD1.3 R1.2
NetR2_1: R2.1 XS1.3 | length 2.4
  Top Layer w0.2: R2.1 35.9,15.825 36.075,16 XS1.3
NetR2_2: R2.2 VD1.1 | length 1.2
  Top Layer w0.2: VD1.1 R2.2
NetR7_1: R7.1 R9.1 R11.2 | length 1.4
  Top Layer w0.2: R9.1 R7.1 R11.2
NetR15_1: R15.1 R17.1 R19.2 | length 1.5
  Top Layer w0.2: R19.2 R15.1 R17.1
REF_1: C12.2 C17.1 C18.1 DA3.8 DA3.9 X1.1 | length 0.8
  Top Layer w0.2: C18.1 v1(8.475,23.521) ; C17.1 v1(9.225,23.521)
  other v1: 16,21.973
REF_2: C16.2 DA3.5 DA3.6 DA5.5 R23.2 R28.1 | length 0.8
  Top Layer w0.2: v1(7.6,15.406) R23.2 ; R28.1 v1(7.6,18.541)
  other v1: 14.025,15.995 16.861,21.973
REF_EN: DA3.2 DA3.3 DD1.E10 | length 16.1
  Top Layer w0.125: v2(25,19.9) DD1.E10
  Top Layer w0.2: DA3.2 16.206,18.222 v1(16.456,18.222) 16.706,18.222 DA3.3
  Bottom Layer w0.2: v1(16.456,18.222) 16.456,20.469 16.431,20.494 16.431,22.038 16.732,22.339 19.212,22.339 22.251,19.3 24.858,19.3 25,19.442 v2(25,19.9)
RF_line_50_Ohm: C6.1 DD1.K4 R4.2 | length 4.7
  Top Layer w0.22: R4.2 C6.1 27.06,25.125 cw(c27.06,24.585) 27.6,24.585 DD1.K4
SCL_Battery: DA2.E5 DD1.C1 R5.1 | length 9.2
  Top Layer w0.125: DD1.C1 v2(29,19.1)
  Top Layer w0.2: DA2.E5 26.22,13.675 26.22,13.985 26.4,14.165 R5.1 26.93,14.837 26.5,15.267 v1(26.5,15.825)
  Bottom Layer w0.2: v1(26.5,15.825) 26.93,16.255 26.93,18.805 27.425,19.3 28.8,19.3 v2(29,19.1)
SDA_Battery: DA2.E4 DD1.C7 R6.1 | length 9.9
  Top Layer w0.125: DD1.C7 v2(26.6,19.1)
  Top Layer w0.2: DA2.E4 28.2,12.975 28.4,13.175 28.4,13.965 28.2,14.165 R6.1 27.755,14.87 26.917,15.708 26.917,16.033 v1(26.5,16.45)
  Bottom Layer w0.2: v1(26.5,16.45) 26.5,19 v2(26.6,19.1)
SWCLK: DD1.A3 XT3.1 | length 12.4
  Top Layer w0.2: DD1.A3 28,16.875 30,14.875 30,11.5 30.75,10.75 33.02,10.75 33.185,10.585 XT3.1
SWDIO: DD1.A5 XT2.1 | length 11.6
  Top Layer w0.2: DD1.A5 27.2,17.215 29.675,14.74 29.675,11.365 30.615,10.425 31.75,10.425 31.915,10.26 XT2.1
USB_D_N: DD1.A1 VD1.4 | length 3.9
  Top Layer w0.22: DD1.A1 28.81,18.49 28.81,17.935 30.21,16.535 30.61,16.535 30.9,16.825 VD1.4
USB_D_P: DD1.A2 VD1.6 | length 4.6
  Top Layer w0.22: DD1.A2 28.4,17.751 30.036,16.115 30.585,16.115 30.875,15.825 VD1.6
V_Battery: DA1.4 DA2.B1 DA2.B2 XS2.1 XS2.2 XS2.3 XS2.4 | length 0.4
  Top Layer w0.2: DA2.B1 DA2.B2
VDD_Analog: C4.1 C15.1 DA2.C5 DA3.7 DA4.7 DA5.7 DD1.H8 DD1.H9 R7.2 R15.2 R22.2 X2.1 | length 6
  Top Layer w0.125: v2(25.4,21.1) DD1.H9 ; v2(25.8,21.1) DD1.H8
  Top Layer w0.2: v1(9.35,19.314) DA4.7 ; v1(12.45,21.139) R22.2 ; v1(14.581,20.875) R7.2 ; DA3.7 v1(16.706,20.608) ; v1(18.331,20.875) R15.2 ; v1(20.389,18.805) C15.1 ; v1(21,19.417) C15.1 ; v1(21.611,18.805) C15.1 ; v1(23.645,20.75) C4.1 ; v1(23.645,21.625) C4.1 ; v1(24,21.202) C4.1
  other v1: 25.12,13.375 14.025,17.295 3.4,24.375
VDD_Bat: C1.1 DA1.5 DD1.C10 R3.2
VDD_Digital: C3.1 C7.1 C9.1 C13.1 DA2.B4 DA2.B5 DA2.C4 DD1.A10 DD1.B1 DD1.B3 DD1.D1 DD1.J3 DD1.J10 DD1.K5 L2.2 R5.2 R6.2 XT1.1 | length 5.7
  Top Layer w0.125: v2(25,18.3) DD1.A10 ; v2(25,21.9) DD1.J10 ; v2(27,22.3) DD1.K5 ; v2(27.8,18.7) DD1.B3 ; DD1.J3 v2(28.2,21.9) ; DD1.B1 v2(29,18.7) ; DD1.D1 v2(29,19.5)
  Top Layer w0.2: C7.1 v1(25.6,23.625) ; R5.2 v1(27.343,13.465) R6.2 ; v1(30.22,18.075) C9.1 ; v1(30.22,22.375) C3.1 ; v1(30.575,17.652) C9.1 ; v1(30.575,18.527) C9.1 ; v1(30.575,21.952) C3.1 ; v1(30.575,22.827) C3.1
  other v1: 34.455,9.565 17.033,10.712 17.033,11.212 17.033,12.431 17.033,12.931 24.72,12.975 25.12,12.975 24.72,13.375
VDD_USB: DA2.A2 FP1.2 R16.2 VD1.5 | length 3.8
  Top Layer w0.2: R16.2 23.875,12.046 24.004,12.175 v1(24.32,12.175) ; VD1.5 31.893,16.325 32.22,15.998 v1(32.22,15.825)
  other v1: 31.05,12.8 31.05,13.3
pads on no net: DA1.3 DD1.A4 DD1.B4 DD1.B5 DD1.B6 DD1.B7 DD1.B8 DD1.B10 DD1.C2 DD1.C3 DD1.C4 DD1.C5 DD1.C6 DD1.C8 DD1.C9 DD1.D2 DD1.D3 DD1.D4 DD1.D5 DD1.D6 DD1.D7 DD1.D8 DD1.D9 DD1.D10 DD1.E2 DD1.E3 DD1.E4 DD1.E5 DD1.E6 DD1.E7 DD1.E8 DD1.E9 DD1.F3 DD1.F4 DD1.F5 DD1.F6 DD1.F7 DD1.F8 DD1.G1 DD1.G2 DD1.G3 DD1.G4 DD1.G5 DD1.G6 DD1.G7 DD1.G8 DD1.G9 DD1.G10 DD1.H1 DD1.H2 DD1.H3 DD1.H4 DD1.H5 DD1.H6 DD1.H7 DD1.J6 DD1.J7 DD1.J8 DD1.K6 DD1.K7 DD1.K8 WA1.2 XS1.4 XS1.6 XS1.7 XS1.NC

## Polygon pours and split planes (outlines as drawn)
VDD_Digital on Layer 2 "VDD_Digital" (solid, pour order 46): 0,27 43,27 43,8 0,8
NetDA2_A4 on Layer 2 "NetDA2_A4" (solid, pour order 28): 24.5,12.795 23.671,12.795 23.671,12.092 18.72,12.092 18.75,12.122 18.75,13.155 24.5,13.155
NetDD1_E1 on Layer 2 "NetDD1_E1" (solid, pour order 10): 30.496,19.69 30.496,20.302 28.68,20.305 28.68,19.513 29.875,19.513 29.875,18.665 33.875,18.665 33.875,19.69
NetC8_1 on Layer 2 "NetC8_1" (solid, pour order 20): 30.496,20.677 30.496,20.311 28.2,20.306 28.2,21.1 29.875,21.1 29.875,21.705 35.75,21.705 35.75,20.677
VDD_Analog on Layer 2 "VDD_Analog" (solid, pour order 0): 6.5,23.835 6.5,27 0,27 0,23.529 3.4,23.529 3.4,21.002 2.9,21.002 2.9,18.9 3.4,18.9 3.4,16 2.933,16 2.933,9.735 8.078,9.735 8.078,15.5 24.25,15.5 24.25,14.875 24.892,14.875 24.892,13.131 25.325,13.131 25.325,15.5 24.945,15.5 24.945,20.703 26.197,20.703 26.197,21.5 24.476,21.5 24.476,22.985 13.905,22.985 13.905,23.835
VDD_USB on Layer 2 "VDD_USB" (solid, pour order 44): 30.416,16.083 32.567,16.083 32.567,15.563 31.239,15.563 31.239,11.675 24.154,11.675 24.154,12.375 30.416,12.375
no net on Layer 2 "Layer 2-No Net" (solid, pour order 52): 18.375,4.125
GND_Digital on Top Layer "GND_Digital" (solid, pour order 48): 3.4,21.002 2.9,21.002 2.898,18.9 3.4,18.9 3.4,16 2.933,16 2.933,14 8.078,14 8.078,15.5 12.625,15.5 12.625,13.375 0,13.375 0,27 43,27 43,8 24.95,8 24.95,19.066 25.375,19.066 25.375,19.525 24.95,19.525 24.95,22.985 13.905,22.985 13.905,23.835 6.5,23.835 6.5,21.375 3.4,21.375
V_Battery on Top Layer "V_Battery" (solid, pour order 22): 24.954,11.975 24.125,11.975 24.125,10.125 12,10.125 12,13.375 0,13.375 0,8 24.954,8
VDD_Bat on Top Layer "VDD_Bat" (solid, pour order 24): 24.95,19.066 25.375,19.066 25.375,19.525 24.95,19.525 23.375,19.525 23.375,15.5 12.625,15.5 12.625,10.752 16,10.752 16,13.983 24.95,13.982
NetC11_1 on Top Layer "NetC11_1" (solid, pour order 16): 20.5,10.625 23.625,10.625 23.625,12.362 24.72,12.362 24.72,12.788 20.5,12.787
REF_2 on Top Layer "REF_2" (solid, pour order 58): 16.5,22.2 16.5,18.393 19.31,18.393 19.31,22.2
REF_1 on Top Layer "REF_1" (solid, pour order 56): 13.625,22.2 13.625,18.393 16.375,18.393 16.375,22.2
GND_Digital on Bottom Layer "GND_Digital" (solid, pour order 62): 0,27 43,27 43,8 0,8
REF_2 on Bottom Layer "REF_2" (solid, pour order 54): 16.25,22.435 18.675,22.435 18.675,13.983 3.4,13.983 3.4,18.75 16.25,18.75
REF_1 on Bottom Layer "REF_1" (solid, pour order 60): 0,27 16.25,27 16.25,18.75 0,18.75
GND_Digital on Layer 1 "GND_Digital" (solid, pour order 50): 0,27 43,27 43,8 0,8
GND_Analog on Layer 1 "GND_Analog" (solid, pour order 32): 24.945,20.5 23.355,20.5 23.355,15.5 8.078,15.5 8.078,9.75 2.933,9.75 2.933,16 3.4,16 3.4,18.9 2.9,18.9 2.9,21.002 3.4,21.002 3.4,21.375 6.5,21.375 6.5,23.835 13.905,23.835 13.905,22.985 24.945,22.985 24.945,21.5 25.4,21.5 25.4,21.098 24.945,21.098

## Other copper
Top Layer:
  pour cut-out: 26.845,25.65 27.075,25.65 cw(c27.075,24.65) 28.075,24.65 28.075,21.7 27.125,21.7 27.125,24.27 ccw(c26.845,24.27) 26.845,24.55 26.375,24.55 22.945,24.55 22.945,23.29 16.875,23.29 16.875,26.49 22.945,26.49 22.945,25.65
  pour cut-out: 22.375,26.49
  pour cut-out: 32,22.125 32,18.254 36.062,18.254 36.062,22.125
Layer 1:
  pour cut-out: 22.946,26.49 22.946,23.29 16.875,23.29 16.875,26.49
Layer 2:
  pour cut-out: 22.945,26.49 22.945,23.29 16.875,23.29 16.875,26.49
Bottom Layer:
  pour cut-out: 22.946,26.49 22.946,23.29 16.887,23.29 16.887,26.49

## Silkscreen, mask and mechanical layers (free items; w line width, h text height)
Top Overlay:
  lines w0.15: 14.5,17.625 14.75,17.875 ; 15,17.625 14.75,17.875 ; 15.125,15.75 14.875,15.75 14.75,15.875 14.75,16 14.75,17.875
Outline:
  lines w0.15: 0,9.25 0,25.73 cw(c1.27,25.73) 1.27,27 41.73,27 cw(c41.73,25.73) 43,25.73 43,9.27 cw(c41.73,9.27) 41.73,8 1.27,8 cw(c1.27,9.27) 0,9.27